# EAGLE board arpie_cv_tab (EAGLE 9.3.0)
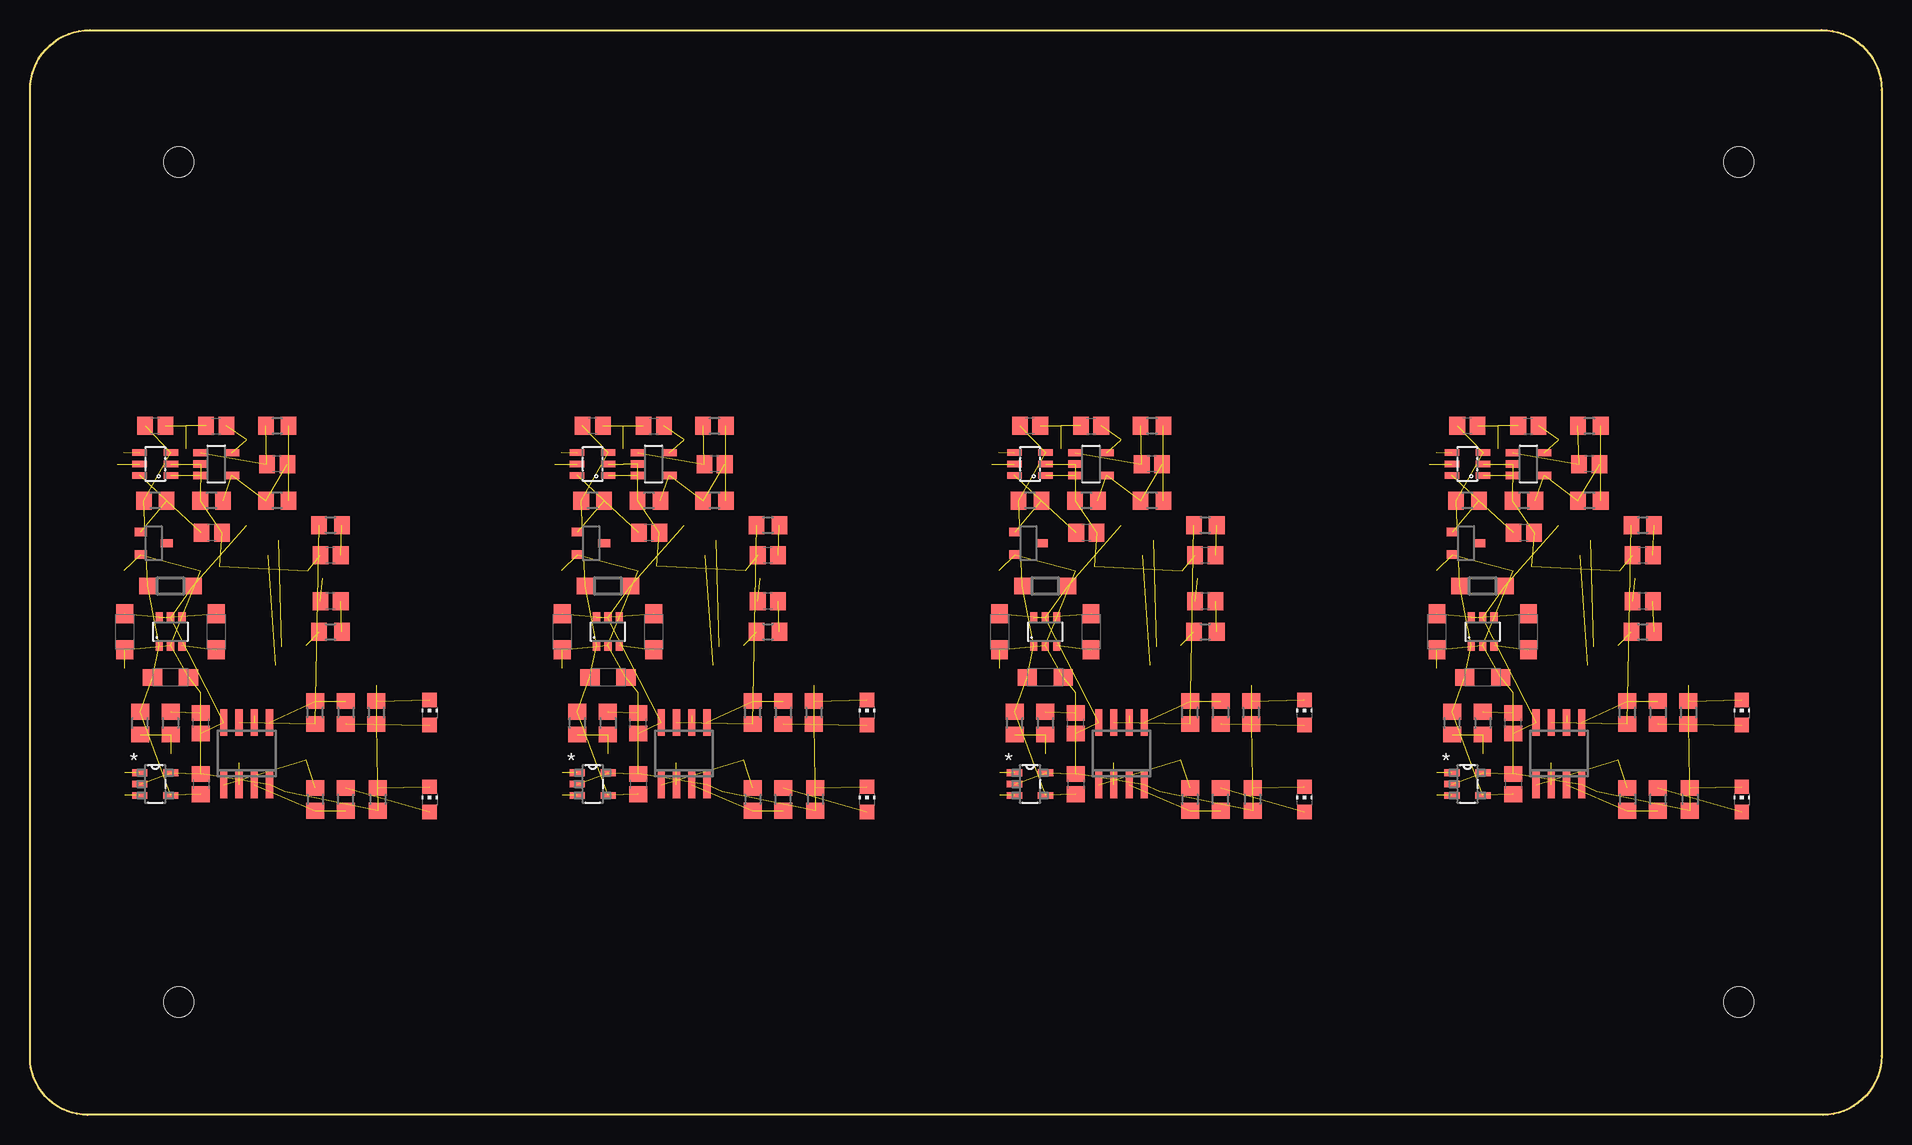
[diagram p0: board, top side]
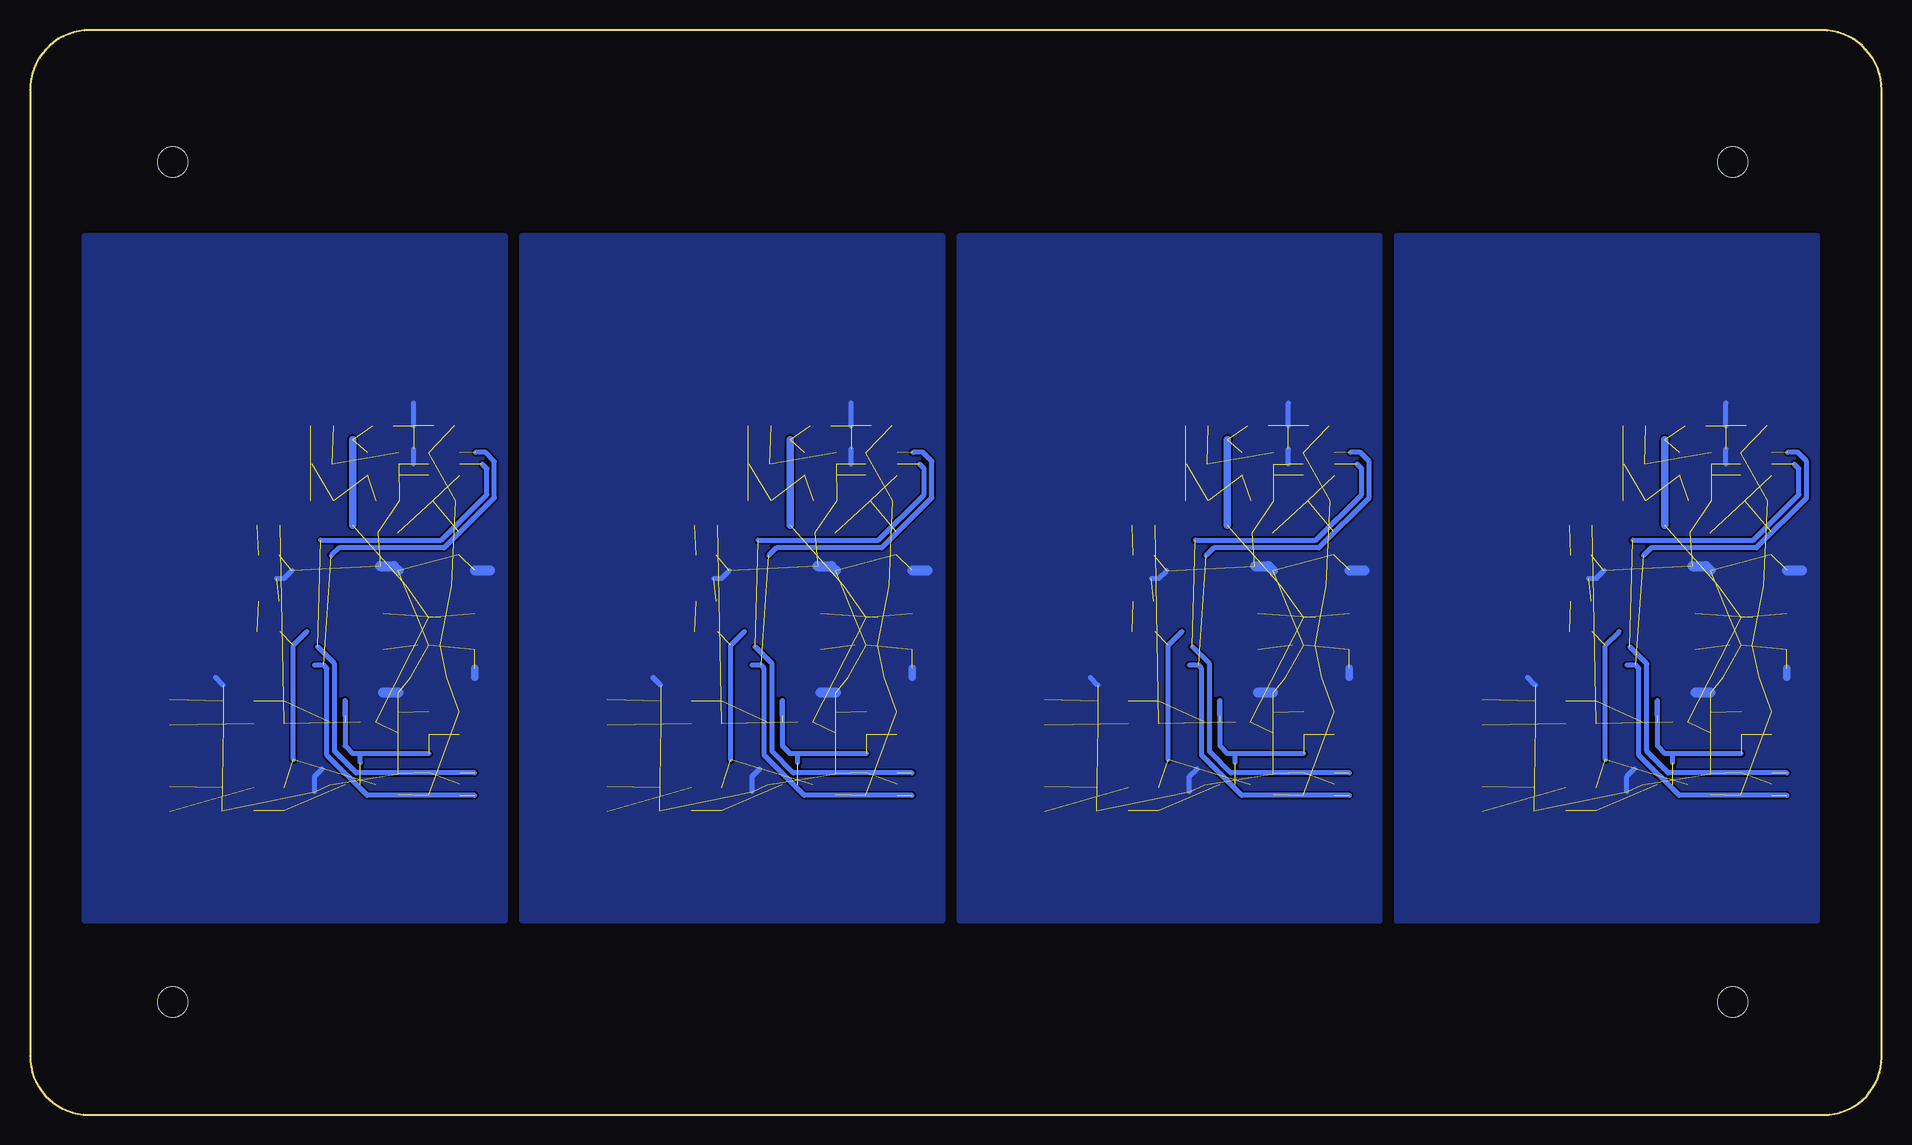
[diagram p1: board, bottom side, seen from below]

Size 154.3 x 90.4 mm. Coordinates in mm from the lower left corner, seen from the top.
Outline: 0,85.4 arc-90 5,90.4 149.3,90.4 arc-90 154.3,85.4 154.3,4.9 arc-90 149.4,0 4.8,0 arc-90 0,4.8 0,85.4
Copper layers (1*16): Top 0.035mm / dielectric 1.5mm / Bottom 0.035mm
Design rules "hackvana": minimum track width 6mil, minimum drill 0.3mm, track to track 6mil, track to pad 9mil, pad to pad 6mil, via to via 6mil, smd to smd 0mil, copper to edge 6mil, drill to drill 6mil, minimum pad ring 10mil, minimum via ring 6mil, stop-mask expansion 2mil, vias tented up to drill 100mil, thermal gap 10mil
Holes 2.5 mm at 12.4,9.4 142.4,9.4 12.4,79.4 142.4,79.4

## Footprints (pad centres in the part's own frame; a part is rotated, then mirrored left to right if it is on the bottom)
C0805 = smd 1.3 x 1.5: 1 -0.85,0; 2 0.85,0
SMC_A = smd 1.6 x 1.4: + -1.5,0; - 1.5,0
CHIP-LED0805 = smd 1.2 x 1.2: A 0,-1.05; C 0,1.05
SOD123 = smd 1.4 x 1.4: A 1.9,0; C -1.9,0
SOT23-6 = smd 0.55 x 1.2: 1 -0.95,-1.3; 2 0,-1.3; 3 0.95,-1.3; 4 0.95,1.3; 5 0,1.3; 6 -0.95,1.3
SOT23-5 = smd 0.6 x 1.2: 1 -0.95,-1.306; 2 0,-1.306; 3 0.95,-1.306; 4 0.95,1.306; 5 -0.95,1.306
SOT23-6' = smd 0.6 x 0.9: 1 -0.95,-1.15; 2 0,-1.15; 3 0.95,-1.15; 4 0.95,1.15; 5 0,1.15; 6 -0.95,1.15
SO08 = smd 0.6 x 2.2: 1 -1.905,-2.6; 2 -0.635,-2.6; 3 0.635,-2.6; 4 1.905,-2.6; 5 1.905,2.6; 6 0.635,2.6; 7 -0.635,2.6; 8 -1.905,2.6
DBZ_R-PDSO-G3 = smd 0.7 x 1: 1 -0.95,-1.1; 2 0.95,-1.1; 3 0,1.1
SOT95P290X145-5N = smd 1.27 x 0.559: 1 -1.295,0.94; 2 -1.295,0; 3 -1.295,-0.94; 4 1.295,-0.94; 5 1.295,0.94
R0805 = smd 1.3 x 1.5: 1 -0.95,0; 2 0.95,0

## Placement (x,y rotation side)
C1  [C0805]  10.44,57.41 180 top
C2  [C0805]  15.52,57.41 0 top
C3  [C0805]  20.6,54.23 180 top
C4  [C0805]  25.04,46.61 180 top
C5  [C0805]  25.04,42.8 180 top
C6  [SMC_A]  7.9,40.26 270 top
C7  10u  [SMC_A]  11.71,36.45 0 top
C8  10u  [SMC_A]  15.52,40.26 270 top
C9  [C0805]  15.14,48.52 180 top
C10  [C0805]  14.25,32.64 90 top
C11  [C0805]  61.49,42.8 180 top
C12  [C0805]  14.25,27.56 270 top
C13  [C0805]  61.49,46.61 180 top
C14  [C0805]  46.89,57.41 180 top
C15  [C0805]  51.97,57.41 0 top
C16  [C0805]  57.05,54.23 180 top
C17  10u  [SMC_A]  51.97,40.26 270 top
C18  [SMC_A]  44.35,40.26 270 top
C19  10u  [SMC_A]  48.16,36.45 0 top
C20  [C0805]  50.7,32.64 90 top
C21  [C0805]  51.59,48.52 180 top
C22  [C0805]  50.7,27.56 270 top
C23  [C0805]  97.94,42.8 180 top
C24  [C0805]  97.94,46.61 180 top
C25  [C0805]  83.34,57.41 180 top
C26  [C0805]  88.42,57.41 0 top
C27  [C0805]  93.5,54.23 180 top
C28  10u  [SMC_A]  88.42,40.26 270 top
C29  [SMC_A]  80.8,40.26 270 top
C30  10u  [SMC_A]  84.61,36.45 0 top
C31  [C0805]  87.15,32.64 90 top
C32  [C0805]  88.04,48.52 180 top
C33  [C0805]  87.15,27.56 270 top
C34  [C0805]  134.39,42.8 180 top
C35  [C0805]  134.39,46.61 180 top
C36  [C0805]  119.79,57.41 180 top
C37  [C0805]  124.87,57.41 0 top
C38  [C0805]  129.95,54.23 180 top
C39  10u  [SMC_A]  124.87,40.26 270 top
C40  [SMC_A]  117.25,40.26 270 top
C41  10u  [SMC_A]  121.06,36.45 0 top
C42  [C0805]  123.6,32.64 90 top
C43  [C0805]  124.49,48.52 180 top
C44  [C0805]  123.6,27.56 270 top
CLK_LED  [CHIP-LED0805]  33.3,26.29 0 top
CLK_LED1  [CHIP-LED0805]  69.75,26.29 0 top
CLK_LED2  [CHIP-LED0805]  106.2,26.29 0 top
CLK_LED3  [CHIP-LED0805]  142.65,26.29 0 top
D1  MBR0520LT  [SOD123]  11.71,44.07 180 top
D2  MBR0520LT  [SOD123]  48.16,44.07 180 top
D3  MBR0520LT  [SOD123]  84.61,44.07 180 top
D4  MBR0520LT  [SOD123]  121.06,44.07 180 top
E$4  [STENCILPIN]  12.4,79.4 0 top
E$5  [STENCILPIN]  12.4,9.4 0 top
E$6  [STENCILPIN]  142.4,9.4 0 top
E$7  [STENCILPIN]  142.4,79.4 0 top
GATE_LED  [CHIP-LED0805]  33.3,33.53 0 top
GATE_LED1  [CHIP-LED0805]  69.75,33.53 0 top
GATE_LED2  [CHIP-LED0805]  106.2,33.53 0 top
GATE_LED3  [CHIP-LED0805]  142.65,33.53 0 top
IC1  MCP4726  [SOT23-6]  10.44,54.23 90 top
IC2  MCP601OT  [SOT23-5]  15.52,54.23 270 top
IC3  LM27675M5_CHARGEPUMP  [SOT23-6']  11.71,40.26 0 top
IC4  LM358D  [SO08]  18.06,30.1 0 top
IC5  LM4041A12DBZ  [DBZ_R-PDSO-G3]  10.31,47.63 270 top
IC6  24LC_16BT-I/OT  [SOT95P290X145-5N]  10.44,27.56 0 top
IC7  MCP4726  [SOT23-6]  46.89,54.23 90 top
IC8  MCP601OT  [SOT23-5]  51.97,54.23 270 top
IC9  LM27675M5_CHARGEPUMP  [SOT23-6']  48.16,40.26 0 top
IC10  LM358D  [SO08]  54.51,30.1 0 top
IC11  LM4041A12DBZ  [DBZ_R-PDSO-G3]  46.76,47.63 270 top
IC12  24LC_16BT-I/OT  [SOT95P290X145-5N]  46.89,27.56 0 top
IC13  MCP4726  [SOT23-6]  83.34,54.23 90 top
IC14  MCP601OT  [SOT23-5]  88.42,54.23 270 top
IC15  LM27675M5_CHARGEPUMP  [SOT23-6']  84.61,40.26 0 top
IC16  LM358D  [SO08]  90.96,30.1 0 top
IC17  LM4041A12DBZ  [DBZ_R-PDSO-G3]  83.21,47.63 270 top
IC18  24LC_16BT-I/OT  [SOT95P290X145-5N]  83.34,27.56 0 top
IC19  MCP4726  [SOT23-6]  119.79,54.23 90 top
IC20  MCP601OT  [SOT23-5]  124.87,54.23 270 top
IC21  LM27675M5_CHARGEPUMP  [SOT23-6']  121.06,40.26 0 top
IC22  LM358D  [SO08]  127.41,30.1 0 top
IC23  LM4041A12DBZ  [DBZ_R-PDSO-G3]  119.66,47.63 270 top
IC24  24LC_16BT-I/OT  [SOT95P290X145-5N]  119.79,27.56 0 top
R1  [R0805]  20.6,57.41 180 top
R2  [R0805]  15.14,51.18 180 top
R3  [R0805]  20.6,51.18 180 top
R4  1k  [R0805]  25.04,49.15 0 top
R5  1k  [R0805]  25.04,40.26 0 top
R6  47k  [R0805]  9.17,32.64 90 top
R7  47k  [R0805]  11.71,32.64 270 top
R8  2m2  [R0805]  23.77,33.53 90 top
R9  100k  [R0805]  26.32,33.53 270 top
R10  1K  [R0805]  28.85,33.53 270 top
R11  2m2  [R0805]  23.77,26.29 270 top
R12  100k  [R0805]  26.32,26.29 90 top
R13  1K  [R0805]  28.98,26.29 270 top
R14  3k  [R0805]  10.44,51.18 180 top
R15  1K  [R0805]  65.3,33.53 270 top
R16  1K  [R0805]  65.43,26.29 270 top
R17  1k  [R0805]  61.49,40.26 0 top
R18  1k  [R0805]  61.49,49.15 0 top
R19  [R0805]  57.05,57.41 180 top
R20  [R0805]  57.05,51.18 180 top
R21  [R0805]  51.59,51.18 180 top
R22  47k  [R0805]  48.16,32.64 270 top
R23  47k  [R0805]  45.62,32.64 90 top
R24  100k  [R0805]  62.76,26.29 90 top
R25  100k  [R0805]  62.76,33.53 270 top
R26  2m2  [R0805]  60.22,33.53 90 top
R27  2m2  [R0805]  60.22,26.29 270 top
R28  3k  [R0805]  46.89,51.18 180 top
R29  1K  [R0805]  101.75,33.53 270 top
R30  1K  [R0805]  101.88,26.29 270 top
R31  1k  [R0805]  97.94,40.26 0 top
R32  1k  [R0805]  97.94,49.15 0 top
R33  [R0805]  93.5,57.41 180 top
R34  [R0805]  93.5,51.18 180 top
R35  [R0805]  88.04,51.18 180 top
R36  47k  [R0805]  84.61,32.64 270 top
R37  47k  [R0805]  82.07,32.64 90 top
R38  100k  [R0805]  99.21,26.29 90 top
R39  100k  [R0805]  99.21,33.53 270 top
R40  2m2  [R0805]  96.67,33.53 90 top
R41  2m2  [R0805]  96.67,26.29 270 top
R42  3k  [R0805]  83.34,51.18 180 top
R43  1K  [R0805]  138.2,33.53 270 top
R44  1K  [R0805]  138.33,26.29 270 top
R45  1k  [R0805]  134.39,40.26 0 top
R46  1k  [R0805]  134.39,49.15 0 top
R47  [R0805]  129.95,57.41 180 top
R48  [R0805]  129.95,51.18 180 top
R49  [R0805]  124.49,51.18 180 top
R50  47k  [R0805]  121.06,32.64 270 top
R51  47k  [R0805]  118.52,32.64 90 top
R52  100k  [R0805]  135.66,26.29 90 top
R53  100k  [R0805]  135.66,33.53 270 top
R54  2m2  [R0805]  133.12,33.53 90 top
R55  2m2  [R0805]  133.12,26.29 270 top
R56  3k  [R0805]  119.79,51.18 180 top

## Library data of the parts
C1-C5 C9-C16 C20-C27 C31-C38 C42-C44 = resistor
C6-C8 C17-C19 C28-C30 C39-C41 R1-R56 = rcl
CLK_LED CLK_LED1-CLK_LED3 GATE_LED GATE_LED1-GATE_LED3 = led
D1-D4 = diode
E$4-E$7 IC3 IC9 IC15 IC21 = jason_eagle6
IC1 IC7 IC13 IC19 = jasons_stuff
IC2 IC4 IC8 IC10 IC14 IC16 IC20 IC22 = linear
IC5 IC11 IC17 IC23 = texas; MPN: LM4041A12IDBZR; OC_FARNELL: 1407949; OC_NEWARK: 58K5875
IC6 IC12 IC18 IC24 = Microchip-24LCxxx; MPN: 24LC16BT-I/OT; OC_FARNELL: 9757961; OC_NEWARK: 62K0580; PACKAGE: SOT-23-5; SUPPLIER: MICROCHIP

## Nets
+5V: C1.2 C7.+ C12.2 D1.A IC1.3 IC3.1 IC6.4 R6.2 R14.2
+5V1: C14.2 C19.+ C22.2 D2.A IC7.3 IC9.1 IC12.4 R23.2 R28.2
+5V2: C25.2 C30.+ C33.2 D3.A IC13.3 IC15.1 IC18.4 R37.2 R42.2
+5V3: C36.2 C41.+ C44.2 D4.A IC19.3 IC21.1 IC24.4 R51.2 R56.2
+10V: C2.2 C6.+ C10.1 D1.C IC2.5 IC3.5 IC4.8
+10V1: C15.2 C18.+ C20.1 D2.C IC8.5 IC9.5 IC10.8
+10V2: C26.2 C29.+ C31.1 D3.C IC14.5 IC15.5 IC16.8
+10V3: C37.2 C40.+ C42.1 D4.C IC20.5 IC21.5 IC22.8
CLK_OUT: CLK_LED.A R12.2
CLK_OUT1: CLK_LED1.A R24.2
CLK_OUT2: CLK_LED2.A R38.2
CLK_OUT3: CLK_LED3.A R52.2
CVOUT: R1.1 R3.1
CVOUT1: R19.1 R20.1
CVOUT2: R33.1 R34.1
CVOUT3: R47.1 R48.1
DACOUT: IC1.1 IC2.3
DACOUT1: IC7.1 IC8.3
DACOUT2: IC13.1 IC14.3
DACOUT3: IC19.1 IC20.3
GATE_OUT: GATE_LED.A R9.2
GATE_OUT1: GATE_LED1.A R25.2
GATE_OUT2: GATE_LED2.A R39.2
GATE_OUT3: GATE_LED3.A R53.2
GND: C1.1 C2.1 C4.2 C5.2 C6.- C7.- C9.1 C10.2 C12.1 IC1.2 IC2.2 IC3.2 IC3.4 IC4.4 IC5.2 IC6.2 IC6.5 R2.2 R7.1 R10.2 R13.2
GND1: C11.2 C13.2 C14.1 C15.1 C18.- C19.- C20.2 C21.1 C22.1 IC7.2 IC8.2 IC9.2 IC9.4 IC10.4 IC11.2 IC12.2 IC12.5 R15.2 R16.2 R21.2 R22.1
GND2: C23.2 C24.2 C25.1 C26.1 C29.- C30.- C31.2 C32.1 C33.1 IC13.2 IC14.2 IC15.2 IC15.4 IC16.4 IC17.2 IC18.2 IC18.5 R29.2 R30.2 R35.2 R36.1
GND3: C34.2 C35.2 C36.1 C37.1 C40.- C41.- C42.2 C43.1 C44.1 IC19.2 IC20.2 IC21.2 IC21.4 IC22.4 IC23.2 IC24.2 IC24.5 R43.2 R44.2 R49.2 R50.1
N$1: IC4.2 IC4.6 R6.1 R7.2
N$2: CLK_LED.C R13.1
N$3: GATE_LED.C R10.1
N$4: IC4.3 R11.2 R12.1
N$5: IC4.5 R8.2 R9.1
N$6: C9.2 IC1.6 IC5.1 R14.1
N$7: C11.1 R17.2
N$8: C13.1 R18.2
N$9: IC4.1 R5.1 R11.1
N$10: IC10.7 R18.1 R26.1
N$11: C3.2 IC2.1 R1.2
N$12: IC4.7 R4.1 R8.1
N$13: IC10.1 R17.1 R27.1
N$14: C16.2 IC8.1 R19.2
N$15: C3.1 IC2.4 R2.1 R3.2
N$16: C16.1 IC8.4 R20.2 R21.1
N$17: C17.+ IC9.6
N$18: C17.- IC9.3
N$19: C5.1 R5.2
N$20: C4.1 R4.2
N$21: IC10.2 IC10.6 R22.2 R23.1
N$22: CLK_LED1.C R16.1
N$23: GATE_LED1.C R15.1
N$24: IC10.3 R24.1 R27.2
N$25: IC10.5 R25.1 R26.2
N$26: C21.2 IC7.6 IC11.1 R28.1
N$27: C23.1 R31.2
N$28: C24.1 R32.2
N$29: IC16.7 R32.1 R40.1
N$30: IC16.1 R31.1 R41.1
N$31: C27.2 IC14.1 R33.2
N$32: C27.1 IC14.4 R34.2 R35.1
N$33: C28.+ IC15.6
N$34: C28.- IC15.3
N$35: IC16.2 IC16.6 R36.2 R37.1
N$36: CLK_LED2.C R30.1
N$37: GATE_LED2.C R29.1
N$38: C8.+ IC3.6
N$39: C8.- IC3.3
N$40: IC16.3 R38.1 R41.2
N$41: IC16.5 R39.1 R40.2
N$42: C32.2 IC13.6 IC17.1 R42.1
N$43: C34.1 R45.2
N$44: C35.1 R46.2
N$45: IC22.7 R46.1 R54.1
N$46: IC22.1 R45.1 R55.1
N$47: C38.2 IC20.1 R47.2
N$48: C38.1 IC20.4 R48.2 R49.1
N$49: C39.+ IC21.6
N$50: C39.- IC21.3
N$51: IC22.2 IC22.6 R50.2 R51.1
N$52: CLK_LED3.C R44.1
N$53: GATE_LED3.C R43.1
N$54: IC22.3 R52.1 R55.2
N$55: IC22.5 R53.1 R54.2
N$56: C43.2 IC19.6 IC23.1 R56.1
SCL: IC1.5 IC6.1
SCL1: IC7.5 IC12.1
SCL2: IC13.5 IC18.1
SCL3: IC19.5 IC24.1
SDA: IC1.4 IC6.3
SDA1: IC7.4 IC12.3
SDA2: IC13.4 IC18.3
SDA3: IC19.4 IC24.3

## Tracks (layer width: path | path; a pad name or v marks a point on that pad's centre or on a via)
+5V  (8 unrouted)
+5V1  (8 unrouted)
+5V2  (8 unrouted)
+5V3  (8 unrouted)
+10V  (7 unrouted)
  Bottom 0.61: 18.06,49.15 18.06,56.26
+10V1  (7 unrouted)
  Bottom 0.61: 54.51,49.15 54.51,56.26
+10V2  (7 unrouted)
  Bottom 0.61: 90.96,49.15 90.96,56.26
+10V3  (7 unrouted)
  Bottom 0.61: 127.41,49.15 127.41,56.26
CLK_OUT  (1 unrouted)
CLK_OUT1  (1 unrouted)
CLK_OUT2  (1 unrouted)
CLK_OUT3  (1 unrouted)
CVOUT  (1 unrouted)
CVOUT1  (1 unrouted)
CVOUT2  (1 unrouted)
CVOUT3  (1 unrouted)
DACOUT  (1 unrouted)
DACOUT1  (1 unrouted)
DACOUT2  (1 unrouted)
DACOUT3  (1 unrouted)
GATE_OUT  (1 unrouted)
GATE_OUT1  (1 unrouted)
GATE_OUT2  (1 unrouted)
GATE_OUT3  (1 unrouted)
GND  (29 unrouted)
  Bottom 0.406: 24.41,44.7 23.77,44.7 23.14,45.34 | 28.85,35.81 29.49,36.45 | 21.23,26.92 21.23,28.2 20.6,28.83 | 12.98,54.23 12.98,55.5 | 12.98,57.41 12.98,59.31
  Bottom 0.61: 7.9,37.21 7.9,36.45
  Bottom 0.813: 14.25,35.18 15.52,35.18 | 7.88,45.36 6.66,45.36 6.63,45.34 | 15.77,45.72 14.63,45.72 14.25,45.34
  pour Bottom: 5.36,73.28 5.36,16.13 40.41,16.13 40.41,73.28
GND1  (29 unrouted)
  Bottom 0.406: 60.86,44.7 60.22,44.7 59.59,45.34 | 65.3,35.81 65.94,36.45 | 57.68,26.92 57.68,28.2 57.05,28.83 | 49.43,54.23 49.43,55.5 | 49.43,57.41 49.43,59.31
  Bottom 0.61: 44.35,37.21 44.35,36.45
  Bottom 0.813: 50.7,35.18 51.97,35.18 | 44.32,45.36 43.1,45.36 43.08,45.34 | 52.22,45.72 51.08,45.72 50.7,45.34
  pour Bottom: 41.81,73.28 41.81,16.13 76.86,16.13 76.86,73.28
GND2  (29 unrouted)
  Bottom 0.406: 97.31,44.7 96.67,44.7 96.04,45.34 | 101.75,35.81 102.39,36.45 | 94.13,26.92 94.13,28.2 93.5,28.83 | 85.88,54.23 85.88,55.5 | 85.88,57.41 85.88,59.31
  Bottom 0.61: 80.8,37.21 80.8,36.45
  Bottom 0.813: 87.15,35.18 88.42,35.18 | 80.77,45.36 79.55,45.36 79.53,45.34 | 88.67,45.72 87.53,45.72 87.15,45.34
  pour Bottom: 78.26,73.28 78.26,16.13 113.31,16.13 113.31,73.28
GND3  (29 unrouted)
  Bottom 0.406: 133.76,44.7 133.12,44.7 132.49,45.34 | 138.2,35.81 138.84,36.45 | 130.58,26.92 130.58,28.2 129.95,28.83 | 122.33,54.23 122.33,55.5 | 122.33,57.41 122.33,59.31
  Bottom 0.61: 117.25,37.21 117.25,36.45
  Bottom 0.813: 123.6,35.18 124.87,35.18 | 117.22,45.36 116,45.36 115.98,45.34 | 125.12,45.72 123.98,45.72 123.6,45.34
  pour Bottom: 114.71,73.28 114.71,16.13 149.76,16.13 149.76,73.28
N$1  (4 unrouted)
  Bottom 0.406: 18.7,33.27 18.7,34.55 18.7,30.73 18.06,30.1 17.43,30.1 | 11.71,30.1 17.43,30.1 | 17.43,29.34 17.43,30.1
N$2  (1 unrouted)
N$3  (1 unrouted)
N$4  (2 unrouted)
N$5  (2 unrouted)
N$6  (3 unrouted)
N$7  (1 unrouted)
N$8  (1 unrouted)
N$9  (3 unrouted)
  Bottom 0.406: 23.01,29.59 23.01,39.12 21.87,40.26
N$10  (2 unrouted)
N$11  (2 unrouted)
N$12  (2 unrouted)
N$13  (3 unrouted)
  Bottom 0.406: 59.46,29.59 59.46,39.12 58.32,40.26
N$14  (2 unrouted)
N$15  (3 unrouted)
N$16  (3 unrouted)
N$17  (1 unrouted)
N$18  (1 unrouted)
N$19  (1 unrouted)
N$20  (1 unrouted)
N$21  (4 unrouted)
  Bottom 0.406: 55.14,33.27 55.14,34.55 55.14,30.73 54.51,30.1 53.87,30.1 | 48.16,30.1 53.87,30.1 | 53.87,29.34 53.87,30.1
N$22  (1 unrouted)
N$23  (1 unrouted)
N$24  (2 unrouted)
N$25  (2 unrouted)
N$26  (3 unrouted)
N$27  (1 unrouted)
N$28  (1 unrouted)
N$29  (2 unrouted)
N$30  (3 unrouted)
  Bottom 0.406: 95.91,29.59 95.91,39.12 94.77,40.26
N$31  (2 unrouted)
N$32  (3 unrouted)
N$33  (1 unrouted)
N$34  (1 unrouted)
N$35  (4 unrouted)
  Bottom 0.406: 91.59,33.27 91.59,34.55 91.59,30.73 90.96,30.1 90.32,30.1 | 84.61,30.1 90.32,30.1 | 90.32,29.34 90.32,30.1
N$36  (1 unrouted)
N$37  (1 unrouted)
N$38  (1 unrouted)
N$39  (1 unrouted)
N$40  (2 unrouted)
N$41  (2 unrouted)
N$42  (3 unrouted)
N$43  (1 unrouted)
N$44  (1 unrouted)
N$45  (2 unrouted)
N$46  (3 unrouted)
  Bottom 0.406: 132.36,29.59 132.36,39.12 131.22,40.26
N$47  (2 unrouted)
N$48  (3 unrouted)
N$49  (1 unrouted)
N$50  (1 unrouted)
N$51  (4 unrouted)
  Bottom 0.406: 128.04,33.27 128.04,34.55 128.04,30.73 127.41,30.1 126.77,30.1 | 121.06,30.1 126.77,30.1 | 126.77,29.34 126.77,30.1
N$52  (1 unrouted)
N$53  (1 unrouted)
N$54  (2 unrouted)
N$55  (2 unrouted)
N$56  (3 unrouted)
SCL  (3 unrouted)
  Bottom 0.406: 7.27,54.23 6.88,53.85 6.88,51.69 10.69,47.88 20.73,47.88 | 7.9,28.5 17.78,28.5 19.56,30.28 19.56,37.57 20.98,38.99
SCL1  (3 unrouted)
  Bottom 0.406: 43.71,54.23 43.33,53.85 43.33,51.69 47.14,47.88 57.18,47.88 | 44.35,28.5 54.23,28.5 56.01,30.28 56.01,37.57 57.43,38.99
SCL2  (3 unrouted)
  Bottom 0.406: 80.16,54.23 79.78,53.85 79.78,51.69 83.59,47.88 93.62,47.88 | 80.8,28.5 90.68,28.5 92.46,30.28 92.46,37.57 93.88,38.99
SCL3  (3 unrouted)
  Bottom 0.406: 116.61,54.23 116.23,53.85 116.23,51.69 120.04,47.88 130.07,47.88 | 117.25,28.5 127.13,28.5 128.91,30.28 128.91,37.57 130.33,38.99
SDA  (3 unrouted)
  Bottom 0.406: 7.82,55.2 6.99,55.2 6.25,54.46 6.25,51.44 10.44,47.24 19.2,47.24 19.84,46.61 | 7.9,26.62 16.87,26.62 20.22,29.97 20.22,37.21 20.47,37.47 21.23,37.47
SDA1  (3 unrouted)
  Bottom 0.406: 44.27,55.2 43.43,55.2 42.7,54.46 42.7,51.44 46.89,47.24 55.65,47.24 56.29,46.61 | 44.35,26.62 53.32,26.62 56.67,29.97 56.67,37.21 56.92,37.47 57.68,37.47
SDA2  (3 unrouted)
  Bottom 0.406: 80.72,55.2 79.88,55.2 79.15,54.46 79.15,51.44 83.34,47.24 92.1,47.24 92.74,46.61 | 80.8,26.62 89.76,26.62 93.12,29.97 93.12,37.21 93.37,37.47 94.13,37.47
SDA3  (3 unrouted)
  Bottom 0.406: 117.17,55.2 116.33,55.2 115.6,54.46 115.6,51.44 119.79,47.24 128.55,47.24 129.19,46.61 | 117.25,26.62 126.21,26.62 129.57,29.97 129.57,37.21 129.82,37.47 130.58,37.47

## Text on the board
_tNames: C1 | R1 | C1 | R1 | C1 | R1 | C1 | R1 | C2 | C2 | C2 | C2 | IC2 | C3 | IC2 | C3 | IC2 | C3 | IC2 | C3 | IC1 | IC1 | IC1 | IC1 | R3 | R3 | R3 | R3 | R2 | R2 | R2 | R2 | R14 | R14 | R14 | R14 | C9 | R4 | C9 | R4 | C9 | R4 | C9 | R4 | C4 | C4 | C4 | C4 | IC5 | IC5 | IC5 | IC5 | D1 | C5 | D1 | C5 | D1 | C5 | D1 | C5 | C6 | C8 | C6 | C8 | C6 | C8 | C6 | C8 | R5 | R5 | R5 | R5 | IC3 | IC3 | IC3 | IC3 | C7 | R8 | R9 | R10 | C7 | R8 | R9 | R10 | C7 | R8 | R9 | R10 | C7 | R8 | R9 | R10 | R6 | R6 | R6 | R6 | R7 | C10 | R12 | R7 | C10 | R12 | R7 | C10 | R12 | R7 | C10 | R12 | IC4 | IC4 | IC4 | IC4 | IC6 | C12 | R13 | IC6 | C12 | R13 | IC6 | C12 | R13 | IC6 | C12 | R13 | R11 | R11 | R11 | R11